# EAGLE board C5 (EAGLE 7.5.0)
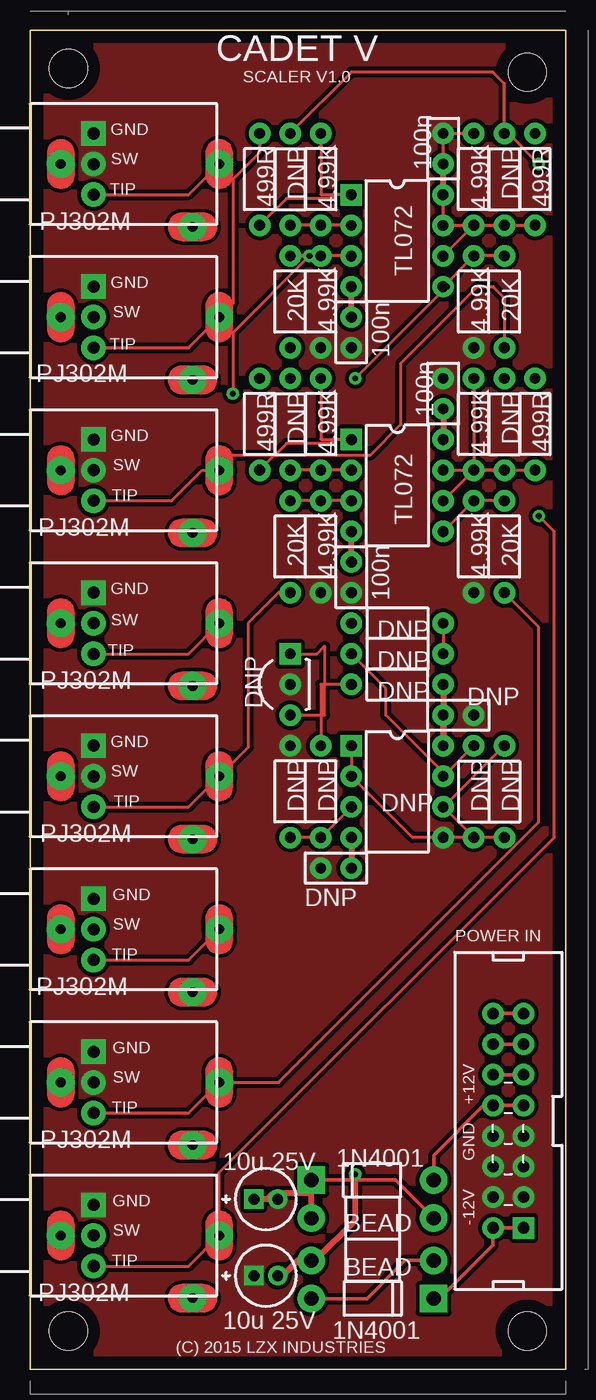
[diagram p0: board, top side]
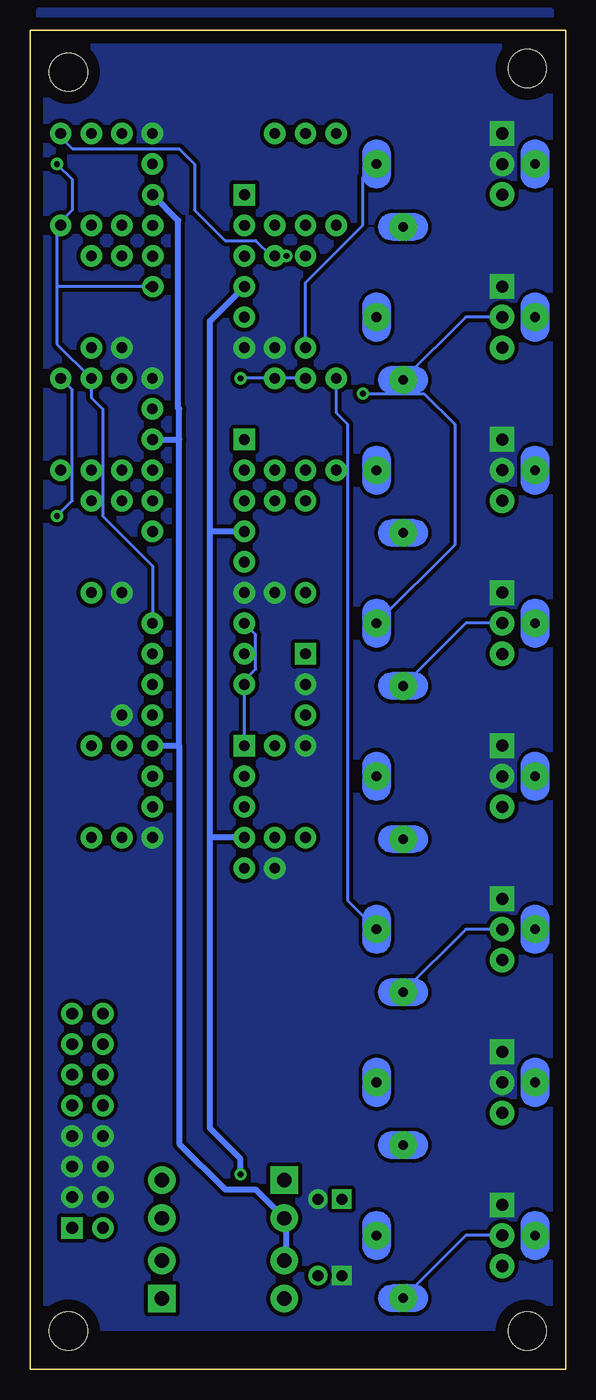
[diagram p1: board, bottom side, seen from below]

Size 44.45 x 111.12 mm. Coordinates in mm from the lower left corner, seen from the top.
Outline: 0,0 44.45,0 44.45,111.12 0,111.12 0,0
Copper layers (1*16): Top 0.035mm / dielectric 1.5mm / Bottom 0.035mm
Design rules "default *": minimum track width 10mil, minimum drill 0.61mm, track to track 8mil, track to pad 8mil, pad to pad 8mil, via to via 8mil, smd to smd 8mil, copper to edge 40mil, drill to drill 8mil, minimum pad ring 0mil, minimum via ring 8mil, stop-mask expansion 2mil, vias tented up to drill 19mil, thermal gap 10mil
Net classes: 0 Default: width 0.254 mm, clearance 0.203 mm, clearance 0.203 mm to class 1; 1 Power Rails: width 0.508 mm, clearance 0.203 mm, clearance 0.203 mm to class 0
Holes 3.17 mm at 3.18,3.17 3.18,107.95 41.28,3.17 41.28,107.63

## Footprints (pad centres in the part's own frame; a part is rotated, then mirrored left to right if it is on the bottom)
CAPPR-2/5.08 = drill 0.9 pad 1.6 square: 1 -0.991,0 | drill 0.9 pad 1.6: 2 0.991,0
CAP-2.54/6.6x3 = drill 0.889 pad 1.778: 1 -1.27,0; 2 1.27,0
CAP-2.54/6.6x3_C5 = drill 0.889 pad 1.778: 1 -1.27,0; 2 1.27,0
CAPPR-2/5.08_C6 = drill 0.9 pad 1.6 square: 1 -0.991,0 | drill 0.9 pad 1.6: 2 0.991,0
CAP-2.54/6.6x3_C7 = drill 0.889 pad 1.778: 1 -1.27,0; 2 1.27,0
CAP-2.54/6.6x3_C9 = drill 0.889 pad 1.778: 1 -1.27,0; 2 1.27,0
DO-41 = drill 1.2 pad 2.286 square: 1 -5.08,0 | drill 1.2 pad 2.286: 2 5.08,0
DO-41_D2 = drill 1.2 pad 2.286 square: 1 -5.08,0 | drill 1.2 pad 2.286: 2 5.08,0
PJ302M = drill 0.8 pad 2.286: 1A 2.54,0; 2A 13.487,-5.207; 3A 15.697,0 | drill 1 pad 2.032 square: 1B 5.258,2.54 | drill 1 pad 2.032: 2B 5.258,0; 3B 5.258,-2.54
IDC16M = drill 0.965 pad 1.778 square: 1 8.89,1.27 | drill 0.965 pad 1.778: 2 8.89,-1.27; 3 6.35,1.27; 4 6.35,-1.27; 5 3.81,1.27; 6 3.81,-1.27; 7 1.27,1.27; 8 1.27,-1.27; 9 -1.27,1.27; 10 -1.27,-1.27; 11 -3.81,1.27; 12 -3.81,-1.27; 13 -6.35,1.27; 14 -6.35,-1.27; 15 -8.89,1.27; 16 -8.89,-1.27
FB-10.16/4.45x3.5 = drill 1.194 pad 2.286: 1 -5.08,0; 2 5.08,0
RES-7.62/5.1x2.5 = drill 0.889 pad 1.778: 1 -3.81,0; 2 3.81,0
RES-7.62/5.1x2.5_R11 = drill 0.889 pad 1.778: 1 -3.81,0; 2 3.81,0
DIP-8_U1 = drill 0.9 pad 1.778 square: 1 -3.81,3.81 | drill 0.9 pad 1.778: 2 -3.81,1.27; 3 -3.81,-1.27; 4 -3.81,-3.81; 5 3.81,-3.81; 6 3.81,-1.27; 7 3.81,1.27; 8 3.81,3.81
TO-92-100R = drill 0.889 pad 1.778 square: 1 2.54,0 | drill 0.889 pad 1.778: 2 0,0; 3 -2.54,0
DIP-8 = drill 0.9 pad 1.778 square: 1 -3.81,3.81 | drill 0.9 pad 1.778: 2 -3.81,1.27; 3 -3.81,-1.27; 4 -3.81,-3.81; 5 3.81,-3.81; 6 3.81,-1.27; 7 3.81,1.27; 8 3.81,3.81

## Placement (x,y rotation side)
C2  10u 25V  [CAPPR-2/5.08]  19.57,14.12 0 top
C3  100n  [CAP-2.54/6.6x3]  34.29,101.28 90 top
C4  100n  [CAP-2.54/6.6x3]  34.29,80.96 90 top
C5  DNP  [CAP-2.54/6.6x3_C5]  35.56,54.29 0 top
C6  10u 25V  [CAPPR-2/5.08_C6]  19.57,7.77 0 top
C7  100n  [CAP-2.54/6.6x3_C7]  26.67,86.04 90 top
C8  100n  [CAP-2.54/6.6x3_C7]  26.67,65.72 90 top
C9  DNP  [CAP-2.54/6.6x3_C9]  25.4,41.59 0 top
D1  1N4001  [DO-41]  28.42,15.71 0 top
D2  1N4001  [DO-41_D2]  28.42,5.87 180 top
J1  PJ302M  [PJ302M]  0,100.01 0 top
J2  PJ302M  [PJ302M]  0,87.31 0 top
J3  PJ302M  [PJ302M]  0,74.61 0 top
J4  PJ302M  [PJ302M]  0,61.91 0 top
J5  PJ302M  [PJ302M]  0,49.21 0 top
J6  PJ302M  [PJ302M]  0,36.51 0 top
J7  PJ302M  [PJ302M]  0,23.81 0 top
J8  PJ302M  [PJ302M]  0,11.11 0 top
J9  EUROPWR16  [IDC16M]  39.69,20.63 270 top
L1  BEAD  [FB-10.16/4.45x3.5]  28.42,12.54 180 top
L2  BEAD  [FB-10.16/4.45x3.5]  28.42,9.05 180 top
R1  20K  [RES-7.62/5.1x2.5]  21.59,88.58 90 top
R2  499R  [RES-7.62/5.1x2.5]  19.05,98.74 90 top
R3  20K  [RES-7.62/5.1x2.5]  39.37,88.58 90 top
R4  4.99K  [RES-7.62/5.1x2.5]  24.13,88.58 90 top
R5  499R  [RES-7.62/5.1x2.5]  41.91,98.74 90 top
R6  4.99K  [RES-7.62/5.1x2.5]  36.83,88.58 90 top
R7  DNP  [RES-7.62/5.1x2.5_R11]  36.83,47.94 270 top
R8  DNP  [RES-7.62/5.1x2.5_R11]  39.37,47.94 270 top
R9  DNP  [RES-7.62/5.1x2.5_R11]  30.48,59.37 180 top
R10  DNP  [RES-7.62/5.1x2.5_R11]  30.48,61.91 180 top
R11  DNP  [RES-7.62/5.1x2.5_R11]  21.59,98.74 270 top
R12  4.99K  [RES-7.62/5.1x2.5]  24.13,98.74 90 top
R13  DNP  [RES-7.62/5.1x2.5_R11]  39.37,98.74 270 top
R14  4.99K  [RES-7.62/5.1x2.5]  36.83,98.74 90 top
R15  20K  [RES-7.62/5.1x2.5]  21.59,68.26 90 top
R16  499R  [RES-7.62/5.1x2.5]  19.05,78.42 90 top
R17  20K  [RES-7.62/5.1x2.5]  39.37,68.26 90 top
R18  4.99K  [RES-7.62/5.1x2.5]  24.13,68.26 90 top
R19  499R  [RES-7.62/5.1x2.5]  41.91,78.42 90 top
R20  4.99K  [RES-7.62/5.1x2.5]  36.83,68.26 90 top
R25  DNP  [RES-7.62/5.1x2.5_R11]  21.59,78.42 270 top
R26  4.99K  [RES-7.62/5.1x2.5]  24.13,78.42 90 top
R27  DNP  [RES-7.62/5.1x2.5_R11]  39.37,78.42 270 top
R28  4.99K  [RES-7.62/5.1x2.5]  36.83,78.42 90 top
R29  DNP  [RES-7.62/5.1x2.5]  30.48,56.83 0 top
R30  DNP  [RES-7.62/5.1x2.5]  24.13,47.94 90 top
R31  DNP  [RES-7.62/5.1x2.5]  21.59,47.94 90 top
U1  TL072  [DIP-8_U1]  30.47,93.65 0 top
U2  TL072  [DIP-8_U1]  30.48,73.34 0 top
U3  DNP  [TO-92-100R]  21.59,56.83 90 top
U4  DNP  [DIP-8]  30.48,47.94 0 top

## Library data of the parts
C2-C9 D1 D2 J9 R1-R20 R25-R31 = common
J1-J8 = common; DATASHEET: http://www.thonk.co.uk/shop/pj302m/
L1 L2 = common; MANUFACTURER: Fair-Rite
U1 U2 U4 = common; DATASHEET: http://datasheets.diptrace.com\ti\TL07x.pdf; MANUFACTURER: Texas Instruments
U3 = common; DATASHEET: http://datasheets.diptrace.com\st_micro\CD00000986.pdf; MANUFACTURER: ST Microelectronics

## Nets
0V: C2.2 C3.2 C4.2 C5.2 C6.1 C7.1 C8.1 C9.1 J1.1A J1.1B J1.2A J1.2B J2.1A J2.1B J3.1A J3.1B J3.2A J3.2B J4.1A J4.1B J5.1A J5.1B J5.2A J5.2B J6.1A J6.1B J7.1A J7.1B J7.2A J7.2B J8.1A J8.1B J9.3 J9.4 J9.5 J9.6 J9.7 J9.8 R4.1 R6.1 R18.1 R20.1 R31.2 U3.2 U4.5
+12V [Power Rails]: C2.1 C3.1 C4.1 C5.1 L1.2 R29.2 U1.8 U2.8 U4.8
-12V [Power Rails]: C6.2 C7.2 C8.2 C9.2 L2.2 U1.4 U2.4 U4.4
Net_0: R30.1 R31.1 U4.3
Net_1: D2.2 L2.1
Net_2: D1.1 L1.1
Net_3: J3.3A J3.3B R3.1
Net_4: R7.2 R8.1 U4.6
Net_5: D2.1 J9.1 J9.2
Net_6: R3.2 R6.2 U1.5
Net_7: J4.3A J4.3B R5.2
Net_8: J1.3A J1.3B R1.1
Net_9: R1.2 R4.2 U1.3
Net_10: R13.2 R14.1 U1.6
Net_11: J2.3A J2.3B R2.2
Net_12: R5.1 R14.2 U1.7
Net_13: J2.2A J2.2B
Net_18: J5.3A J5.3B R15.1
Net_19: R15.2 R18.2 U2.3
Net_20: J6.3A J6.3B R16.2
Net_21: R25.2 R26.1 U2.2
Net_22: R16.1 R26.2 U2.1
Net_23: J7.3A J7.3B R17.1
Net_24: R17.2 R20.2 U2.5
Net_25: J8.3A J8.3B R19.2
Net_26: R27.2 R28.1 U2.6
Net_27: R19.1 R28.2 U2.7
Net_31: R8.2 R10.2 U4.1 U4.2
Net_32: R7.1 R9.2 U4.7
Net_33: D1.2 J9.9 J9.10
Net_34: J9.11 J9.12
Net_35: J9.13 J9.14
Net_36: J9.15 J9.16
Net_37: J4.2A J4.2B
Net_38: J6.2A J6.2B
Net_39: J8.2A J8.2B
Net_50: R29.1 R30.2 U3.1 U3.3
Net_52: R11.2 R12.1 U1.2
Net_53: R2.1 R12.2 U1.1
VREF: R9.1 R10.1 R11.1 R13.1 R25.1 R27.1

## Tracks (layer width: path | path; a pad name or v marks a point on that pad's centre or on a via)
0V
  pour Top (isolate 0.33, no thermals): 0.95,110.17 43.34,110.18 43.34,0.95 0.95,0.95 0.95,9.21
  pour Bottom (isolate 0.33, no thermals): 1.27,112.71 43.66,112.72 43.66,3.49 1.27,3.49 1.27,11.75
+12V
  Top 0.508: 34.29,97.47 C3.1 | L1.2 23.34,14.6 20.16,14.6 19.69,14.12 C2.1 | C4.1 U2.8 | C5.1 U4.8 C5.1 | R29.2 C5.1
  Bottom 0.508: U4.8 32.07,51.75 | 32.07,51.75 32.07,18.73 28.26,14.92 25.72,14.92 L1.2 | 32.07,51.75 32.07,77.15 | 32.07,77.15 32.07,79.69 32.15,79.69 32.15,95.33 34.29,97.47 | U2.8 32.07,77.15
-12V  (via drill 0.49 pad 1.02)
  Top 0.508: C6.2 20.97,7.77 22.24,9.04 L2.2 23.65,9.04 26.99,12.38 v26.99,16.19 | C8.2 U2.4 | U4.4 C9.2 | C7.2 26.67,89.85
  Bottom 0.508: L2.2 23.18,9.04 23.18,11.58 | U4.4 29.53,44.13 | 29.53,44.13 29.53,69.53 | 29.53,69.53 29.53,87 26.67,89.85 | U2.4 29.53,69.53 | v26.99,16.19 26.99,17.46 29.53,20 29.53,44.13
Net_0
  Top 0.254: U4.3 R30.1 | R30.1 | R30.1 R31.1 | R31.1
Net_1
  Top 0.305: D2.2 27.94,5.87 31.12,9.04 L2.1
Net_2
  Top 0.305: D1.1 30.32,15.71 L1.1
Net_3
  Top 0.254: J3.3B 11.75,72.07 14.29,74.61 J3.3A 15.7,74.75 16.83,75.88 28.26,75.88 30.8,78.42 30.8,83.5 37.15,89.85 38.42,89.85 39.37,88.9 R3.1
Net_4
  Top 0.254: R8.1 U4.6 R7.2 | R8.1 | R7.2
Net_5
  Top 0.305: J9.1 J9.2 | J9.2 | J9.2 38.42,10.31 33.98,5.87 D2.1
Net_6
  Top 0.254: R3.2 R6.2 | R6.2 | R6.2 | R6.2 34.29,89.85
Net_7  (via drill 0.49 pad 1.02)
  Top 0.254: J4.3B 13.16,59.37 J4.3A | v23.18,92.39 16.83,86.04 v16.83,80.96
  Bottom 0.254: R5.2 41.91,102.23 40.96,101.28 32.07,101.28 30.8,100.01 30.8,96.2 28.26,93.66 25.72,93.66 24.45,92.39 v23.18,92.39 | v16.83,80.96 11.75,80.96 9.21,78.42 9.21,68.4 J4.3A
Net_8
  Top 0.254: J1.3B 13.16,97.47 J1.3A
  Bottom 0.254: R1.1 21.59,90.17 16.83,94.93 16.83,98.88 J1.3A
Net_9
  Top 0.254: 26.67,92.39 R1.2 | R1.2 | R1.2 R4.2 | R4.2
Net_10
  Top 0.254: R14.1 R13.2 | R13.2 | 34.29,92.39 R14.1 | R14.1
Net_11
  Top 0.254: J2.3B 13.16,84.77 J2.3A 16.83,88.44 16.83,98.74 19.05,100.97 R2.2
Net_12
  Top 0.254: 34.29,94.93 | 34.29,94.93 R5.1 | R5.1 | R5.1 | 34.29,94.93 34.29,102.55 R14.2
Net_13
  Bottom 0.254: J2.2B 8.28,87.31 J2.2A
Net_18
  Top 0.254: J5.3B 13.16,46.67 J5.3A 18.1,51.61 18.1,61.91 20.64,64.45 R15.1
Net_19
  Top 0.254: U2.3 R18.2 | R18.2 | R18.2 R15.2 | R15.2
Net_20
  Top 0.254: J6.3B 13.16,33.97 J6.3A
  Bottom 0.254: R16.2 19.05,79.38 18.1,78.42 18.1,38.91 J6.3A
Net_21
  Top 0.254: U2.2 R26.1 | R26.1 | R26.1 R25.2 | R25.2
Net_22
  Top 0.254: U2.1 25.08,77.15 | 25.08,77.15 25.08,76.84 21.27,76.84 R16.1 | R26.2 24.13,77.15 25.08,77.15
Net_23
  Top 0.254: J7.3B 13.16,21.27 J7.3A 20.64,23.81 42.23,45.4 42.23,61.59 R17.1
Net_24
  Top 0.254: R17.2 R20.2 | R20.2 | R20.2 U2.5 | U2.5
Net_25  (via drill 0.49 pad 1.02)
  Top 0.254: J8.3B 13.16,8.57 J8.3A 15.7,16.33 43.5,44.13 43.5,69.53 v42.23,70.8
  Bottom 0.254: v42.23,70.8 40.96,72.07 40.96,81.28 R19.2
Net_26
  Top 0.254: R27.2 R28.1 | R28.1 | R28.1 U2.6 | U2.6
Net_27
  Top 0.254: U2.7 | U2.7 36.83,74.61 | 36.83,74.61 R19.1 | R19.1 | R28.2 36.83,74.61
Net_31
  Top 0.254: R8.2 31.75,44.13 U4.2 U4.1
  Bottom 0.254: U4.1 26.67,57.15 25.72,58.1 25.72,60.96 R10.2
Net_32
  Top 0.254: R7.1 U4.7 | U4.7 | U4.7 34.29,49.53 29.53,54.29 29.53,56.52 R9.2
Net_33
  Top 0.305: J9.9 J9.10 | J9.10 | J9.10 37.63,21.9 33.5,17.78 D1.2
Net_34
  Top 0.305: J9.12 J9.11 | J9.11
Net_35
  Top 0.305: J9.14 J9.13 | J9.13
Net_36
  Top 0.305: J9.15 J9.16 | J9.16
Net_37
  Bottom 0.254: J4.2B 8.28,61.91 J4.2A
Net_38
  Bottom 0.254: J6.2B 8.28,36.51 J6.2A
Net_39
  Bottom 0.254: J8.2B 8.28,11.11 J8.2A
Net_50
  Top 0.254: U3.1 23.81,59.37 24.45,60.01 24.45,56.83 | 24.45,56.83 24.13,56.83 R30.2 | U3.3 24.45,54.29 24.45,56.83 | R29.1 24.45,56.83
Net_52
  Top 0.254: 26.67,94.93 R12.1 | R12.1 | R12.1 R11.2 | R11.2
Net_53
  Top 0.254: 26.67,97.47 25.08,97.47 | 25.08,97.47 25.08,97.16 21.27,97.16 R2.1 | R12.2 24.13,97.47 25.08,97.47
VREF  (via drill 0.49 pad 1.02)
  Top 0.254: v26.99,82.23 v34.61,89.85 | R11.1 26.67,107.63 38.42,107.63 39.37,106.68 R13.1 39.69,102.55 v42.23,100.01 | R10.1 R9.1 R10.1
  Bottom 0.254: R25.1 | R25.1 v26.99,82.23 | v34.61,89.85 42.23,89.85 | 42.23,89.85 42.23,85.09 R27.1 39.37,80.64 38.42,79.69 38.42,70.8 34.29,66.67 R10.1 | v42.23,100.01 40.96,98.74 40.96,96.2 42.23,94.93 42.23,89.85

## Text on the board
tPlace: CADET V | SCALER V1.0 | GND | SW | 100n | TIP | DNP | DNP | 499R | 4.99K | 4.99K | 499R | PJ302M | GND | TL072 | SW | 20K | 20K | 4.99K | 4.99K | TIP | 100n | PJ302M | 100n | GND | 499R | DNP | 4.99K | 4.99K | DNP | 499R | SW | TIP | TL072 | PJ302M | 20K | 20K | GND | 4.99K | 4.99K | 100n | SW | TIP | DNP | DNP | PJ302M | DNP | DNP | DNP | GND | SW | TIP | DNP | DNP | DNP | DNP | DNP | PJ302M | GND | DNP | SW | POWER IN | TIP | PJ302M | GND | SW | TIP | +12V | PJ302M | GND | 10u 25V | 1N4001 | GND | SW | -12V | BEAD | TIP | BEAD | PJ302M | 10u 25V | (C) 2015 LZX INDUSTRIES | 1N4001
tDocu: 100n | DNP | DNP | 499R | 4.99K | 4.99K | 499R | PJ302M | TL072 | 20K | 20K | 4.99K | 4.99K | 100n | PJ302M | 100n | 499R | DNP | 4.99K | 4.99K | DNP | 499R | TL072 | PJ302M | 20K | 20K | 4.99K | 4.99K | 100n | DNP | DNP | PJ302M | DNP | DNP | DNP | DNP | DNP | DNP | DNP | DNP | PJ302M | DNP | PJ302M | PJ302M | 10u 25V | 1N4001 | BEAD | BEAD | PJ302M | 10u 25V | 1N4001